# Altium PCB Parking_System2.PcbDoc
Units mm, origin at the board's own origin, x right, y up, seen from the top; angles counter-clockwise.
Board outline 118.25 x 73.25 mm, 2 copper layers (Top Layer, Bottom Layer); 22 components, 37 nets, 126 pads, 8 vias.
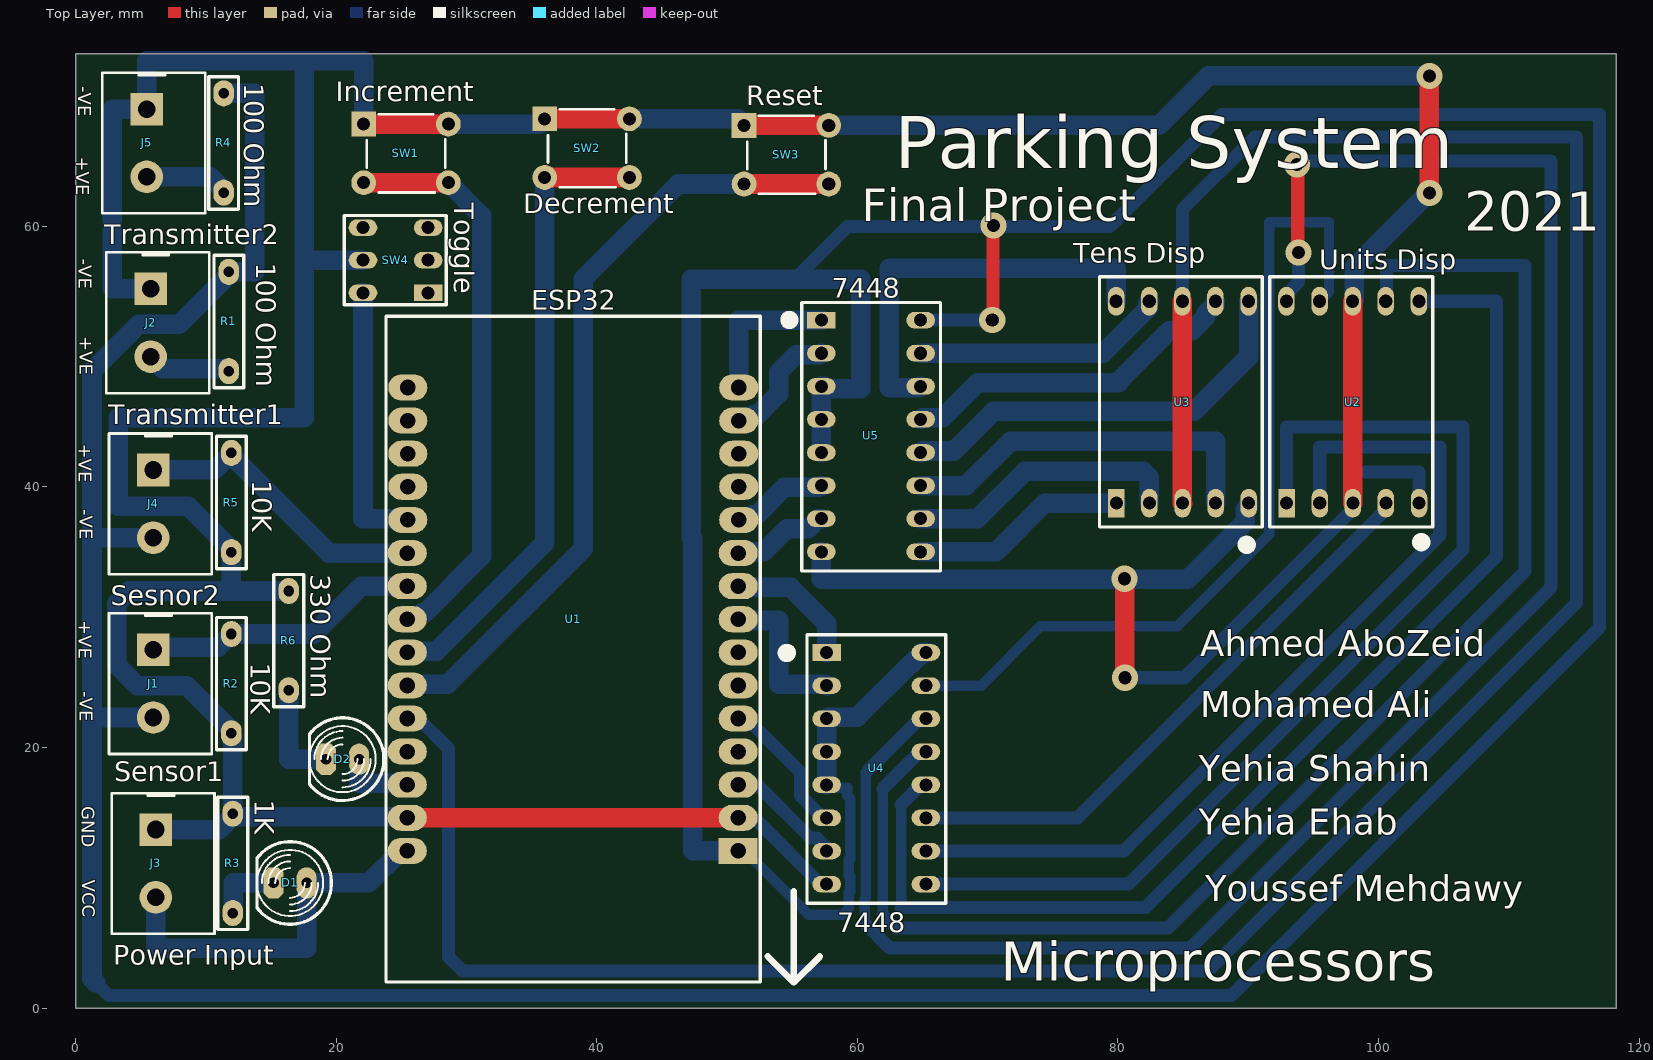
[diagram p0: Top Layer view]
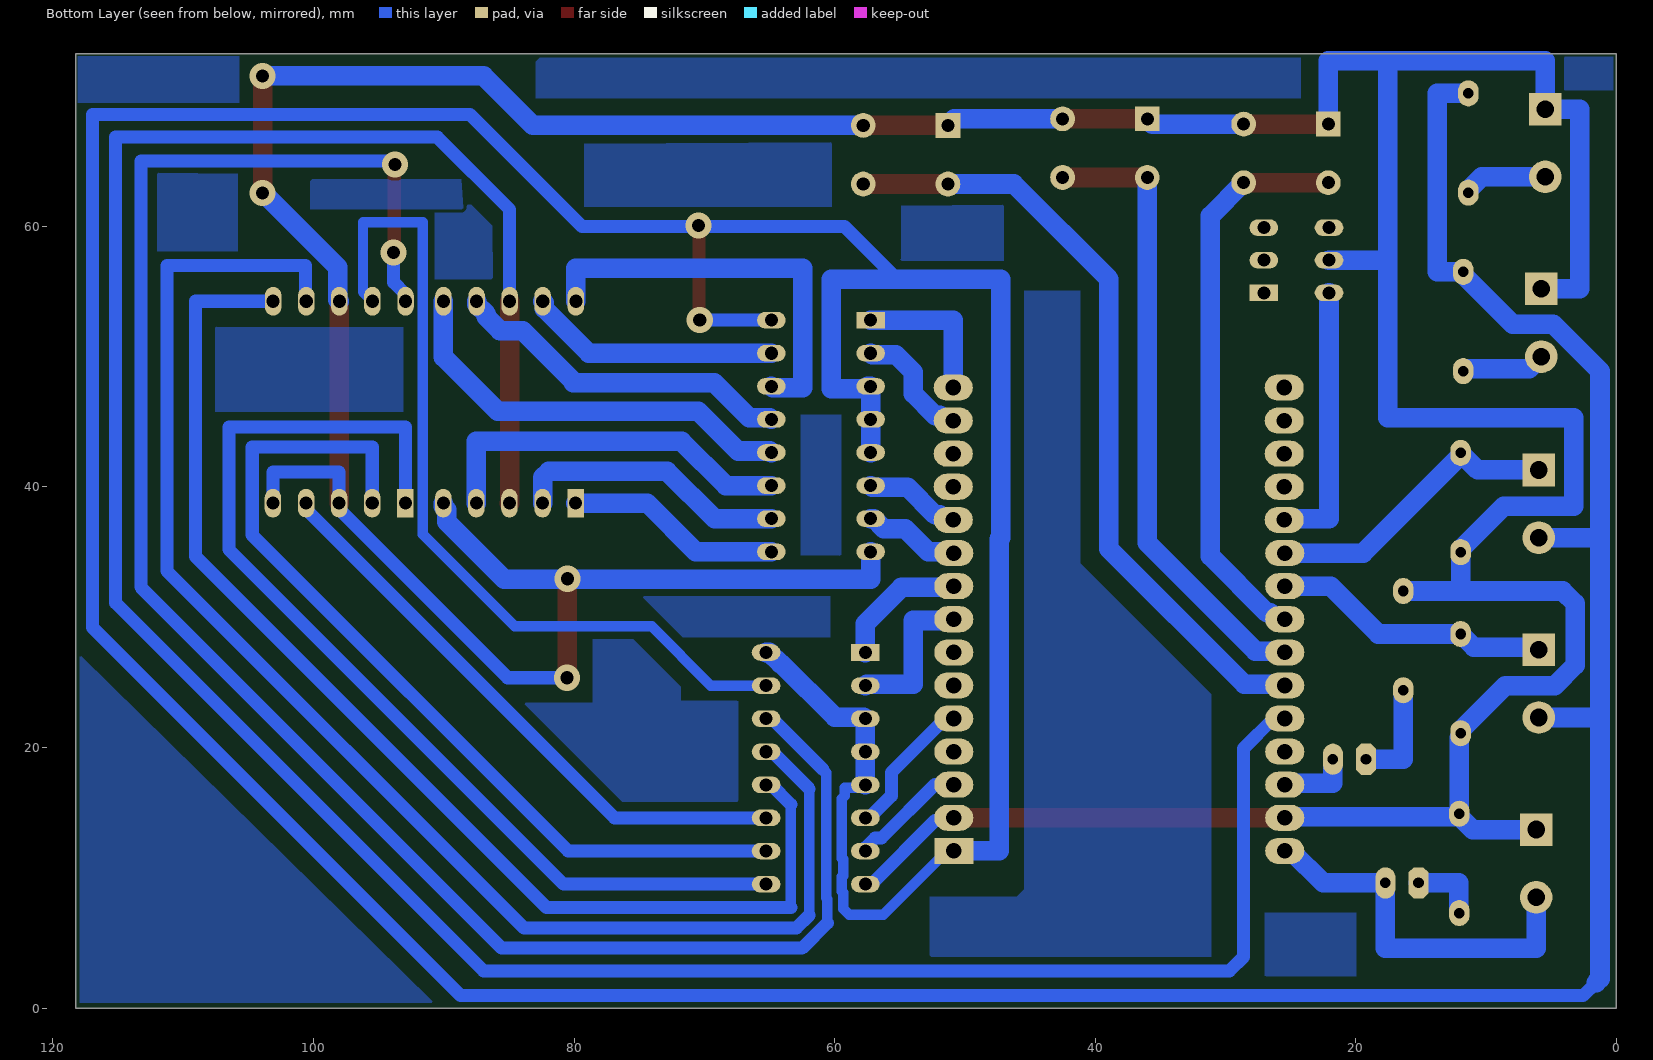
[diagram p1: Bottom Layer view, seen from below]

## Layer stack, top to bottom
Top Solder: solder mask 0.0102, Solder Resist, Dk 3.5
Top Layer: signal copper 0.0356
Dielectric 1: dielectric 0.32, FR-4, Dk 4.8
Bottom Layer: signal copper 0.0356
Bottom Solder: solder mask 0.0102, Solder Resist, Dk 3.5

## Board outline
0,0 118.25,0 118.25,73.25 0,73.25

## Design rules (kind name [scope] priority, off if disabled: settings)
Clearance [All] p1: gap=0.254 ignorepadtopadclearanceinfootprint=FALSE except(0: Arc-Hole Track-Hole SMDPad-Hole THPad-Hole Via-Hole Fill-Hole Poly-Hole Region-Hole Text-Hole; 0.3: Arc-SMDPad Arc-THPad Track-SMDPad Track-THPad; 0.4: Arc-Arc Arc-Track Arc-Via Track-Track Track-Via SMDPad-SMDPad SMDPad-THPad SMDPad-Via THPad-THPad THPad-Via Via-Via)
PolygonConnect [All] p1: connectstyle=Relief reliefconductorwidth=0.254 reliefentries=4 polygonreliefangle="90 Angle" airgapwidth=0.254
RoutingVias [All] p1: holewidth=0.711 width=1.27 viastyle="Through Hole" minholewidth=0.711 minwidth=1.27 maxholewidth=0.711 maxwidth=1.27
SolderMaskExpansion [All] p1: expansion=0.102
Width [All] p1: maxlimit=1.5 minlimit=0.8 preferedwidth=1
30 further rules are at their usual default settings.

## Components (designator, comment, footprint, x,y, rotation, side; value= is the part's Value field where it differs from the comment)
D1 "LED" "LED-05 R" 16.45,9.6 r180 top
D2 "LED" "LED-05 R" 20.48,19.1 r180 top
J1 "Sensor1" CON 6.05,24.9 r270 top
J2 "Transmitter1" CON 5.85,52.6 r270 top
J3 "Power Input" CON 6.25,11.1 r270 top
J4 "Sesnor2" CON 6.05,38.7 r270 top
J5 "Transmitter2" CON 5.55,66.4 r270 top
R1 "100 Ohm" Resistor 11.75,52.7 r90 top
R2 "10K" Resistor 11.95,24.9 r270 top
R3 "1K" Resistor 12.05,11.1 r270 top
R4 "100 Ohm" Resistor 11.35,66.4 r90 top
R5 "10K" Resistor 11.95,38.8 r270 top
R6 "330 Ohm" Resistor 16.35,28.2 r90 top
SW1 "Increment" "DIP4 SW" 25.35,65.6 r90 top
SW2 "Decrement" "DIP4 SW" 39.25,66 r90 top
SW3 "Reset" "DIP4 SW" 54.55,65.5 r90 top
SW4 "Toggle" "DIP6 - SW" 24.55,57.4 r180 top
U1 "ESP32" ESP32 50.85,12.06 r180 top
U2 "Units Disp" SSD 98.023,46.5 r90 top
U3 "Tens Disp" SSD 84.95,46.5 r90 top
U4 "7448" DIP16 61.45,18.4 r0 top
U5 "7448" DIP16 61.04,43.91 r0 top

## Footprints (in the part's own frame and the unit in brackets; to place one, negate y for a bottom-side part, rotate by r counter-clockwise, add the part's x,y. Pads: shape width x height; smd on the part's side, far side on the other; paste and mask are expansions set on the pad)
CON [mm]
  round 2.5 hole 1.35: 1(2.6,-0.1)
  rect 2.5x2.5 hole 1.35: 2(-2.6,-0.1)
  silkscreen extent -5.4,-3.5 5.4,4.4, body extent -5.08,-3.3 5.08,4.2, height 10
"DIP4 SW" [mm]
  rect 1.9x1.9 hole 1: 1(2.25,3.25)
  round 1.9 hole 1: 2(2.25,-3.25) 3(-2.25,3.25) 4(-2.25,-3.25)
  silkscreen extent -3,-3 3,3, body extent -3,-3.9 2.99,3.9, height 5
"DIP6 - SW" [mm]
  rect 2.2x1.27 hole 1: 1(-2.5,2.5)
  oval 2.2x1.27 hole 1: 2(-2.5,0) 3(-2.5,-2.5) 4(2.5,-2.5) 5(2.5,0) 6(2.5,2.5)
  silkscreen extent -3.89,-3.43 3.94,3.43, body extent -3.05,-2.84 2.95,3.16, height 10.2
DIP16 [mm]
  rect 2.2x1.27 hole 1: 1(-3.81,8.89)
  oval 2.2x1.27 hole 1: 2(-3.81,6.35) 3(-3.81,3.81) 4(-3.81,1.27) 5(-3.81,-1.27) 6(-3.81,-3.81) 7(-3.81,-6.35) 8(-3.81,-8.89) 9(3.81,-8.89) 10(3.81,-6.35) 11(3.81,-3.81) 12(3.81,-1.27) 13(3.81,1.27) 14(3.81,3.81) 15(3.81,6.35) 16(3.81,8.89)
  silkscreen extent -5.32,-10.36 5.34,10.25, body extent -5.24,-10.25 5.26,10.16, height 8.06
ESP32 [mm]
  rect 3x2 hole 1.2: 1(0,0)
  oval 3x2 hole 1.2: 2(0,-2.54) 3(0,-5.08) 4(0,-7.62) 5(0,-10.16) 6(0,-12.7) 7(0,-15.24) 8(0,-17.78) 9(0,-20.32) 10(0,-22.86) 11(-0.04,-25.41) 12(-0.04,-27.95) 13(-0.04,-30.49) 14(-0.04,-33.03) 15(-0.04,-35.57) 16(25.36,-35.57) 17(25.36,-33.03) 18(25.36,-30.49) 19(25.36,-27.95) 20(25.36,-25.41) 21(25.4,-22.86) 22(25.4,-20.32) 23(25.4,-17.78) 24(25.4,-15.24) 25(25.4,-12.7) 26(25.4,-10.16) 27(25.4,-7.62) 28(25.4,-5.08) 29(25.4,-2.54) 30(25.4,0)
  silkscreen extent -1.7,-41.05 27.03,10.06, body extent -1.58,-40.97 26.92,9.96, height 15.2
"LED-05 R" [mm] "Light emitting diode dia 5mm red color"
  oct 1.524x2.4 hole 0.813: 1(1.27,0)
  oval 1.524x2.4 hole 0.813: 2(-1.27,0)
  silkscreen extent -3.17,-3.17 2.54,3.17, body extent -2.98,-3.01 2.44,3.01, height 12.31
Resistor [mil]
  oval 78.74x62 hole 32: 1(-150,0) 2(150,0)
  silkscreen extent -200,-45 200,45, body extent -159,-39 159,39, height 79
SSD [mm]
  rect 2.2x1.27 hole 1: 1(-7.75,5.073)
  oval 2.2x1.27 hole 1: 2(-7.75,2.533) 3(-7.75,-0.007) 4(-7.75,-2.547) 5(-7.75,-5.087) 6(7.75,-5.072) 7(7.75,-2.532) 8(7.75,0.008) 9(7.75,2.548) 10(7.75,5.088)
  silkscreen extent -9.58,-6.13 9.63,6.37, body extent -9.46,-6.05 9.54,6.25, height 8

## Part data
J1 J2 J3 J4 J5: library part 1935161, "Conn Terminal Blocks 2 POS 5mm Solder ST Thru-Hole 16A", Color=Green, Current=18A, Current Rating=17.5A, Flammability Rating="UL94 V-0", Manufacturer 1="Phoenix Contact", Max Current Rating=16A, Max Supply Voltage=250V, Package Quantity=250, Supplier Part Number 1=277-1667-ND, Voltage=300V, Voltage Rating (DC)=320V, Approvals=UL, ComponentLink1Description=https://datasheet.ciiva.com/15169/getdatasheetpartid-177903-15169663.pdf?src-supplier=Verical, ComponentLink1URL=https://datasheet.ciiva.com/15169/getdatasheetpartid-177903-15169663.pdf?src-supplier=Verical, ComponentLink2Description=https://datasheet.ciiva.com/16047/1935161-16047247.pdf?src-supplier=Onlinecomponents.com, ComponentLink2URL=https://datasheet.ciiva.com/16047/1935161-16047247.pdf?src-supplier=Onlinecomponents.com, ComponentLink3Description=https://datasheet.ciiva.com/824/combiconcompact5-0mmseries-824222.pdf?src-supplier=Digi-Key, ComponentLink3URL=https://datasheet.ciiva.com/824/combiconcompact5-0mmseries-824222.pdf?src-supplier=Digi-Key, Connector Type=Screw, Contact Material=Copper,Tin, Depth=9mm, Height=11.3mm, Housing Color=Green, Housing Material=Polyamide, Insulation Material=Nylon, Lead Free="Lead Free", Length=9mm, Manufacturer Part Number 1=1935161, Material=Nylon, Mount="Through Hole", Number of Circuits=2, Number of Contacts=2, Number of Levels=1, Number of Pins=2, Number of Poles=2, Number of Positions=2, Number of Positions Per Level=2, Number of Rows=1, Orientation=Straight, Packaging=Bulk, Pitch=5mm, Pricing 1="1=0.43000, 10=0.41100, 50=0.39280, 100=0.38200, 250=0.35700, 500=0.32844, 1000=0.30350 (USD)", Radiation Hardening=No, REACH SVHC=Unknown, RoHS=Yes, Stock 1=59845, Supplier 1=Digi-Key, Termination=Solder, Voltage Rating=250V, Weight=0.067021oz, Width=14.9mm, Wire/Cable Gauge=26AWG, Wire Gauge (Max)=26AWG, Wire Gauge (Min)=12AWG
R1 R2 R3 R4 R5 R6: library part Resistor
SW1 SW2 SW3: library part "Push Button"
SW4: library part "On-Off Push Button"
U2 U3: library part SSD, "Seven Segment Display / Coomin Cathode"
U4 U5: "BCD to 7 segment decoder / Common Cathode"

## Via types
v1: diameter 2, hole 1, Top Layer to Bottom Layer, 8 vias

## Nets (pads, with @x,y where several pads share a name; then routed paths per layer and width w, separated by ;. In a path a pad name is that pad's centre, name@x,y a point inside that pad or via, vN(x,y) a via of type N, cw(c..) or ccw(c..) an arc to the next point about the centre after c; other vN are vias at no path point)
3V3: J1.1 J4.1 R1.2 R4.2 U1.1 U4.3 U4.4 U4.5 U4.16 U5.3 U5.4 U5.5 U5.16 | length 448.1
  Top Layer w1: v1(70.35,52.8) 70.4,52.85 70.4,60 v1(70.45,60.05)
  Bottom Layer w0.8: U1.1 51.35,12.06 56.26,7.15 58.881,7.15 59.35,7.619 59.35,8.867 59.44,8.957 59.44,10.063 59.35,10.153 59.35,11.407 59.44,11.497 59.44,16.06 59.209,16.291 59.209,16.9 57.87,16.9 U4.5
  Bottom Layer w1: 1.55,1.95 2.55,0.95 88.7,0.95 116.95,29.2 116.95,68.6 88,68.6 79.4,60 59.25,60 55.2,55.95 ; U5.16 v1(70.35,52.8)
  Bottom Layer w1.5: 1.55,1.95 1.25,2.25 1.25,22.3 ; 1.85,36.1 J4.1 ; J1.1 1.25,22.3 ; R4.2 13.75,70.21 13.75,56.51 R1.2 11.75,56.297 7.953,52.5 4.856,52.5 1.25,48.894 1.25,22.3 ; U1.1 47.35,12.06 47.35,36 47.25,36.1 47.25,55.95 55.2,55.95 60.25,55.95 60.25,47.538 57.647,47.538 57.465,47.72 U5.3 U5.4 U5.5 ; U4.5 U4.4 U4.3 57.755,22.325 59.987,22.325 64.097,26.435 64.17,26.435 65.025,27.29 U4.16
Adc1: J1.2 R2.1 U1.22 | length 21.5
  Bottom Layer w1.5: J1.2 6.15,27.7 10.94,27.7 R2.1 18.26,28.71 21.93,32.38 U1.22
Adc2: J4.2 R5.1 U1.21 | length 23.4
  Bottom Layer w1.5: J4.2 10.64,41.3 R5.1 11.95,42.397 19.427,34.92 U1.21
Dec: SW2.3 SW2.4 U1.24 | length 48.6
  Top Layer w1.5: SW2.3 SW2.4
  Bottom Layer w1.5: U1.24 25.546,27.396 27.696,27.396 36,35.7 SW2.3
EN: U1.26 U3.3 U3.8 | length 209.7
  Top Layer w1.5: U3.8 84.95,54.243 84.95,38.757 U3.3
  Bottom Layer w1: U1.26 26.309,22.22 28.6,19.929 28.6,3.936 29.686,2.85 86.95,2.85 115.2,31.1 115.2,66.85 90.5,66.85 84.942,61.292 U3.8
GND: J2.2 J3.2 J5.2 R2.2 R3.1 R5.2 R6.2 SW1.1 SW1.2 SW2.1 SW2.2 SW3.1 SW3.2 SW4.5 U1.2 U1.29 U2.3 U2.5 U2.8 U3.5 U4.8 U5.8 | length 398.5
  Top Layer w1.5: SW1.1 SW1.2 ; U1.29 U1.2 ; SW2.1 SW2.2 ; SW3.1 SW3.2 ; v1(80.5,32.95) 80.525,32.925 80.525,25.375 v1(80.55,25.35) ; U2.8 98.022,54.243 98.022,38.758 U2.3 ; v1(103.9,71.55) 103.906,71.544 103.906,62.556 v1(103.912,62.55)
  Bottom Layer w1: U1.2 51.041,14.409 52.274,14.409 57.173,9.51 U4.8 ; v1@81,25.55 81.2,25.35 85.095,25.35 98.03,38.285 U2.3 98.03,41.15 103.11,41.15 U2.5
  Bottom Layer w1.5: J2.2 2.8,55.2 2.8,69 J5.2 5.45,72.7 17.55,72.7 ; J3.2 11.032,13.7 12.05,14.718 R3.1@12.05,14.73 ; R6.2@16.35,31.797 R6.2 11.9,32.01 ; SW4.5 17.55,57.4 ; SW1.1 22.1,72.7 17.55,72.7 ; U1.29 25.354,14.696 12.085,14.696 R3.1@12.05,14.73 ; SW1.2 35.6,67.85 SW2.1 ; SW2.2 50.8,68.25 SW3.1 ; U5.8 57.23,32.9 85.35,32.9 89.765,37.315 89.765,38.243 90.037,38.515 U3.5 ; SW3.2 83.15,67.75 86.95,71.55 v1(103.9,71.55) ; U2.8 98.13,54.365 98.13,56.857 103.823,62.55 v1(103.912,62.55) ; 11.9,32.01 4.11,32.01 3.15,31.05 3.15,26.315 4.715,24.75 8.503,24.75 11.95,21.303 R2.2 11.95,20.857 12.05,20.757 R3.1 R3.1@12.05,14.73 ; 11.9,32.01 11.936,32.046 11.936,34.976 R5.2 11.95,35.203 8.653,38.5 3.25,38.5 3.25,45.3 17.55,45.3 17.55,57.4 ; 17.55,57.4 17.55,72.7
IN1_A: U1.3 U4.7 | length 9.1
  Bottom Layer w1: U1.3 52.31,17.14 56.395,13.055 56.895,13.055 57.588,12.362 57.588,12.102 U4.7
IN1_B: U1.10 U5.7 | length 7.5
  Bottom Layer w1.5: U1.10 50.946,35.016 52.801,35.016 54.59,36.805 56.24,36.805 56.995,37.56 U5.7
IN2_A: U1.9 U4.1 | length 10.2
  Bottom Layer w1.5: U1.9 50.946,32.284 54.866,32.284 57.64,29.51 U4.1
IN2_B: U1.15 U5.1 | length 11.5
  Bottom Layer w1.5: U1.15 50.89,52.8 U5.1
IN4_A: U1.8 U4.2 | length 11.8
  Bottom Layer w1.5: U1.8 50.946,29.744 53.95,29.744 53.95,24.865 57.525,24.865 U4.2
IN4_B: U1.14 U5.2 | length 9.4
  Bottom Layer w1.5: U1.14 51.525,45.09 51.915,45.48 52.281,45.48 53.95,47.149 53.95,48.8 55.295,50.145 57.115,50.145 U5.2
IN8_A: U1.5 U4.6 | length 11
  Bottom Layer w1: U1.5 51.497,22.22 55.64,18.077 55.64,16.29 57.288,14.642 57.588,14.642 U4.6
IN8_B: U1.11 U5.6 | length 7.4
  Bottom Layer w1.5: U1.11 51.525,37.47 51.915,37.86 52.281,37.86 54.406,39.985 57.115,39.985 U5.6
Inc: SW1.3 SW1.4 U1.23 | length 43.9
  Top Layer w1.5: SW1.3 SW1.4
  Bottom Layer w1.5: U1.23 26.085,29.84 26.575,30.33 26.799,30.33 31.15,34.681 31.15,60.8 SW1.4
Ind: D2.2 U1.28 | length 5.6
  Bottom Layer w1.5: D2.2 21.75,17.236 25.354,17.236 U1.28
NetD1_1: D1.1 R3.2 | length 5.4
  Bottom Layer w1.5: R3.2 12.05,7.482 12.085,7.517 12.085,9.6 D1.1
NetD2_1: D2.1 R6.1 | length 8.1
  Bottom Layer w1.5: R6.1 16.364,24.376 16.364,19.1 D2.1
NetJ2_1: J2.1 R1.1 | length 6.6
  Bottom Layer w1.5: J2.1 6.668,49.082 11.75,49.082 R1.1
NetJ5_1: J5.1 R4.1 | length 6.5
  Bottom Layer w1.5: J5.1 10.332,63.8 11.35,62.782 R4.1
NetSW4_6: SW4.6 U1.20 | length 20.8
  Bottom Layer w1.5: SW4.6 22.05,37.566 25.394,37.566 U1.20
Reset: SW3.3 SW3.4 U1.25 | length 60.4
  Top Layer w1.5: SW3.3 SW3.4
  Bottom Layer w1.5: U1.25 25.546,24.856 28.556,24.856 38.95,35.25 38.95,55.95 46.25,63.25 SW3.3
SSD1_A: U2.7 U4.13 | length 112.1
  Bottom Layer w0.8: 61.95,7.12 61.95,16.825
  Bottom Layer w1: 61.95,7.12 62.92,6.15 83.85,6.15 111.25,33.55 111.25,57 100.607,57 100.607,54.302 U2.7 ; 61.95,16.825 64.795,19.67 U4.13
SSD1_B: U2.6 U4.12 | length 92.9
  Bottom Layer w0.8: 63.35,7.7 63.35,15.612
  Bottom Layer w1: 63.35,7.7 82.1,7.7 109.05,34.65 109.05,54.25 U2.6 ; 63.35,15.612 64.868,17.13 U4.12
SSD1_C: U2.4 U4.11 | length 45.6
  Bottom Layer w1: U4.11 76.875,14.59 100.57,38.285 U2.4
SSD1_D: U2.2 U4.10 | length 69.7
  Bottom Layer w1: U4.10 80.45,12.05 104.7,36.3 104.7,43.05 95.49,43.05 U2.2
SSD1_E: U2.1 U4.9 | length 80.7
  Bottom Layer w1: U4.9 80.81,9.51 106.5,35.2 106.5,44.6 92.95,44.6 U2.1
SSD1_F: U2.9 U4.15 | length 66.1
  Bottom Layer w0.8: U4.15 69.5,24.75 74.05,29.3 84.55,29.3 91.615,36.365 91.615,42.911 91.6,42.926 91.6,60.3 96.2,60.3 96.2,54.975 U2.9
SSD1_G: U2.10 U4.14 | length 146.1
  Top Layer w1: v1(93.75,64.75) 93.8,64.7 93.8,58.05 v1(93.85,58)
  Bottom Layer w0.8: 60.55,6.54 60.55,8.37 60.64,8.46 60.64,18.055 60.9,18.315
  Bottom Layer w1: 60.55,6.54 62.49,4.6 85.55,4.6 113.25,32.3 113.25,65 94,65 v1(93.75,64.75) ; 60.9,18.315 64.795,22.21 U4.14 ; U2.10 92.935,54.788 93.85,55.703 v1(93.85,58)
SSD2_A: U3.7 U5.13 | length 26.6
  Bottom Layer w1.5: U5.13 64.965,45.295 66.545,45.295 69.25,48 80.05,48 ; 80.05,48.1 83.95,52 85.682,52 86.727,53.046 86.727,53.26 87.482,54.015 U3.7
SSD2_B: U3.6 U5.12 | length 32.5
  Bottom Layer w1.5: U5.12 64.965,42.755 67.405,42.755 70.45,45.8 85.85,45.8 90.022,49.972 U3.6
SSD2_C: U3.4 U5.11 | length 28.8
  Bottom Layer w1.5: U5.11 68.35,40.1 71.75,43.5 87.497,43.5 U3.4
SSD2_D: U3.2 U5.10 | length 21.2
  Bottom Layer w1.5: U5.10 69.21,37.56 72.85,41.2 81.939,41.2 82.417,40.721 U3.2
SSD2_E: U3.1 U5.9 | length 16.6
  Bottom Layer w1.5: U5.9 70.65,35.02 74.38,38.75 U3.1
SSD2_F: U3.9 U5.15 | length 19.5
  Bottom Layer w1.5: U5.15 78.862,50.26 82.287,53.686 82.287,54.135 U3.9
SSD2_G: U3.10 U5.14 | length 31.6
  Bottom Layer w1.5: U5.14 64.735,47.605 62.45,47.605 62.45,56.8 79.862,56.8 U3.10
VCC: D1.2 J3.1 U1.30 | length 29.2
  Bottom Layer w1.5: J3.1 6.15,4.6 17.72,4.6 D1.2 22.49,9.6 24.95,12.06 U1.30
pads on no net: SW4.1 SW4.2 SW4.3 SW4.4 U1.4 U1.6 U1.7 U1.12 U1.13 U1.16 U1.17 U1.18 U1.19 U1.27

## Polygon pours and split planes (outlines as drawn)
no net on Bottom Layer "Bottom Layer-No Net" (solid, pour order 30): 47.05,61.65 47,61.6 47,57.35 54.85,57.35 54.95,57.45 54.9,57.5 54.9,61.6
no net on Bottom Layer "Bottom Layer-No Net 1" (solid, pour order 28): 52.7,8.55 52.7,4.05 52.6,3.95 31.1,3.95 31.1,24.1 41.15,34.15 41.15,55.05 43.15,55.05 45.45,55.05 45.45,9.1 46,8.55
no net on Bottom Layer "Bottom Layer-No Net 2" (solid, pour order 26): 19.95,7.3 19.95,2.45 26.85,2.45 26.95,2.35 27,2.4 27,7.3
no net on Bottom Layer "Bottom Layer-No Net 3" (solid, pour order 22): 117.95,27.122 117.95,0.4 90.772,0.4
no net on Bottom Layer "Bottom Layer-No Net 4" (solid, pour order 20): 67.4,23.6 67.4,15.95 67.35,15.9 67.4,15.85 76.3,15.85 83.85,23.4 83.8,23.45 78.55,23.45 78.55,28.3 75.45,28.3 71.8,24.65 71.8,23.6 67.45,23.6 67.35,23.5
no net on Bottom Layer "Bottom Layer-No Net 5" (solid, pour order 18): 60.35,31.6 60.35,28.45 71.65,28.45 74.8,31.6
no net on Bottom Layer "Bottom Layer-No Net 6" (solid, pour order 16): 59.55,34.7 59.5,34.75 59.5,45.55 62.6,45.55 62.6,34.75
no net on Bottom Layer "Bottom Layer-No Net 7" (solid, pour order 14): 86.25,55.95 90.75,55.95 90.7,56 90.7,61.65 87.9,61.65 86.289,60.039
no net on Bottom Layer "Bottom Layer-No Net 8" (solid, pour order 12): 88.5,61.35 88.55,61.3 100.25,61.3 100.25,63.45 100.1,63.6 88.65,63.6
no net on Bottom Layer "Bottom Layer-No Net 9" (solid, pour order 10): 93.1,52.25 93.1,45.75 107.55,45.75 107.55,52.3
no net on Bottom Layer "Bottom Layer-No Net 10" (solid, pour order 8): 60.25,66.45 60.2,66.4 60.2,61.5 79.2,61.5 79.2,66.35
no net on Bottom Layer "Bottom Layer-No Net 11" (solid, pour order 6): 105.8,64.049 105.8,58.1 112,58.1 112,64.1
no net on Bottom Layer "Bottom Layer-No Net 12" (solid, pour order 4): 105.7,73.05 105.7,69.5 118.1,69.5 118.1,73.05
no net on Bottom Layer "Bottom Layer-No Net 13" (solid, pour order 2): 24.2,72.95 24.2,69.85 82.95,69.85 82.95,72.65 82.65,72.95
no net on Bottom Layer "Bottom Layer-No Net 14" (solid, pour order 0): 0.25,70.45 4,70.45 4,72.95 3.95,73 0.25,73

## Silkscreen, mask and mechanical layers (free items; w line width, h text height)
Top Overlay:
  lines w0.5: 53.12,3.96 55.12,1.96 ; 55.12,8.96 55.12,1.96 ; 57.12,3.96 55.12,1.96
  lines w1: 54.779,27.239 cw(c54.58,27.26) 54.78,27.26 ; 54.979,52.789 cw(c54.78,52.81) 54.98,52.81 ; 90.079,35.539 cw(c89.88,35.56) 90.08,35.56 ; 103.479,35.739 cw(c103.28,35.76) 103.48,35.76
  text "-VE" at 0.2,70.75 h1 r270
  text "+VE" at 0.05,65.35 h1 r270
  text "Parking System" at 62.85,64.45 h4
  text "Final Project" at 60.35,60.4 h2.5
  text "2021" at 106.6,59.65 h3
  text "-VE" at 0.25,57.5 h1 r270
  text "+VE" at 0.3,51.55 h1 r270
  text "+VE" at 0.25,43.3 h1 r270
  text "-VE" at 0.3,38.3 h1 r270
  text "+VE" at 0.25,29.75 h1 r270
  text "Ahmed AboZeid" at 86.3,27 h2
  text "-VE" at 0.3,24.3 h1 r270
  text "Mohamed Ali" at 86.3,22.3 h2
  text "Yehia Shahin" at 86.2,17.4 h2
  text "GND" at 0.45,15.5 h1 r270
  text "Yehia Ehab" at 86.2,13.3 h2
  text "VCC" at 0.5,9.85 h1 r270
  text "Youssef Mehdawy" at 86.7,8.2 h2
  text "Microprocessors" at 71,2.1 h3